# EAGLE board glowbs_5 (EAGLE 7.1.0)
DESIGNER: Quin from Qtechknow; VERSION: v10
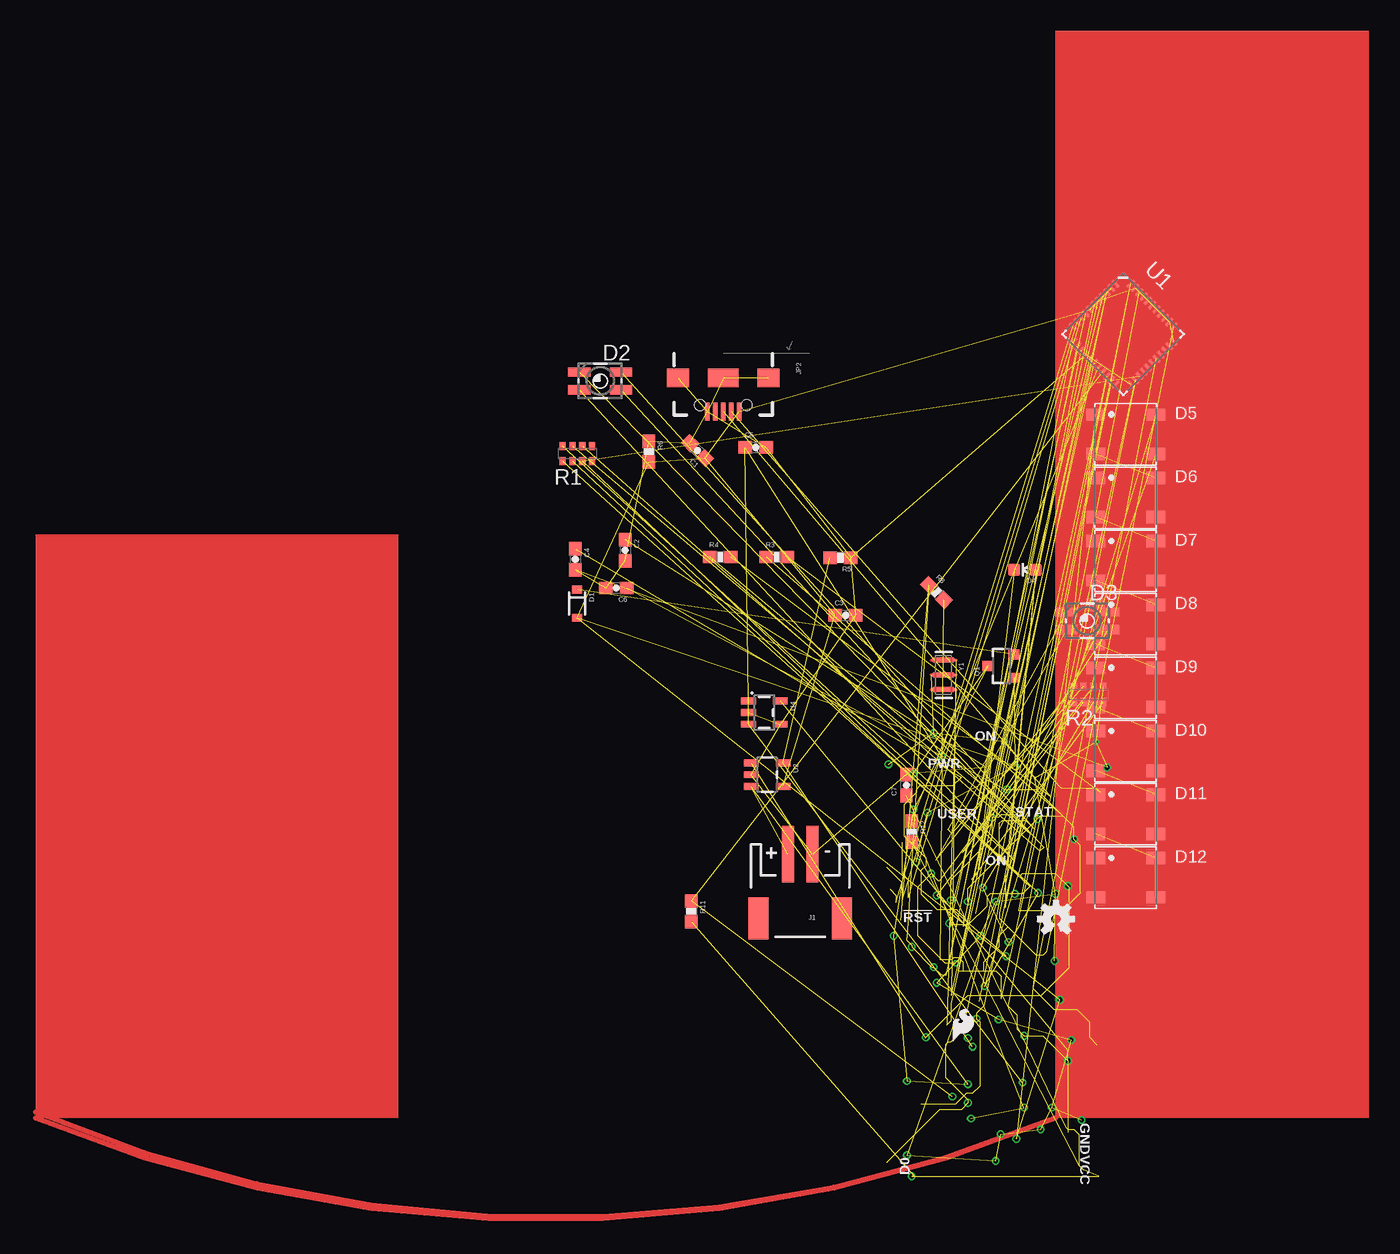
[diagram p0: board, top side]
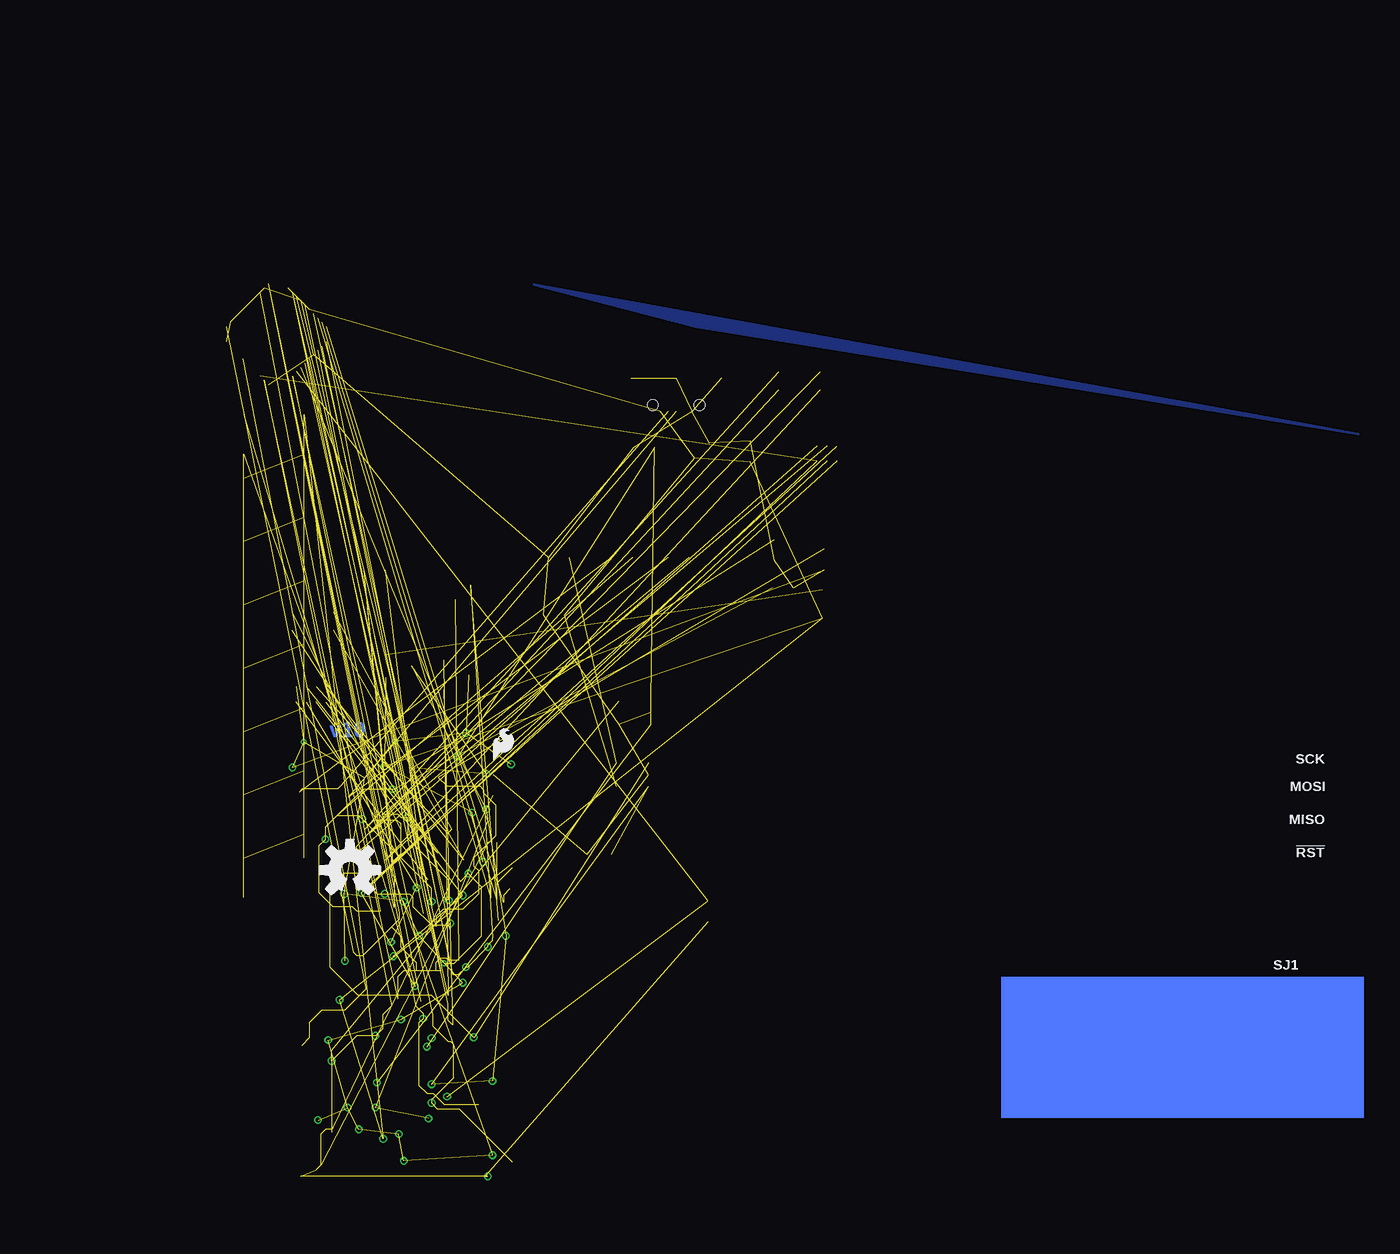
[diagram p1: board, bottom side, seen from below]

No outline drawn. Coordinates in mm, seen from the top.
Copper layers (1*16): Top 0.035mm / dielectric 1.5mm / Bottom 0.035mm
Design rules "Gold_Phoenix_Standard_Spec_2_layer": minimum track width 5mil, minimum drill 6mil, track to track 5mil, track to pad 5mil, pad to pad 5mil, via to via 5mil, smd to smd 5mil, copper to edge 8mil, drill to drill 8mil, minimum pad ring 5mil, minimum via ring 5mil, stop-mask expansion 4mil, vias tented up to drill 20mil, thermal gap 10mil
Net classes: 2 gnd: width 0.254 mm, drill 0.61 mm, clearance 0.254 mm

## Footprints (pad centres in the part's own frame; a part is rotated, then mirrored left to right if it is on the bottom)
0603-CAP = smd 1.1 x 1: 1 -0.85,0; 2 0.85,0
SOD-323 = smd 0.63 x 0.83: A 1.15,0; C -1.15,0
P-LCC-4-3 = smd 0.75 x 1.8: 1 0.725,1.7; 2 -0.725,1.7; 3 -0.725,-1.7; 4 0.725,-1.7
LED-0603 = smd 1 x 1: A 0,-0.877; C 0,0.877
WS2812B = smd 1.5 x 1: 1 -2.45,1.6; 2 -2.45,-1.6; 3 2.45,-1.6; 4 2.45,1.6
JST-2-SMD = smd 1 x 4.6: 1 -1,-3.7; 2 1,-3.7 | smd 1.6 x 3.4: NC1 -3.4,1.5; NC2 3.4,1.5
USB-B-MICRO-SMD_V03 = smd 1.45 x 0.4: D+1 2.725,0; D-1 2.725,0.65; GND1 2.725,-1.3; ID1 2.725,-0.65; VBUS1 2.725,1.3 | smd 1.5 x 1.8: SHIELD1 0,3.685; SHIELD2 0,-3.685 | smd 1.5 x 2.5: SHIELD3 0,0 | hole 0.85: 2.2,1.9; 2.2,-1.9
SOT23-3 = smd 0.8 x 0.9: 1 -0.95,-1; 2 0.95,-1; 3 0,1.1
0603-ARV = smd 0.5 x 0.65: 1 -1.2,-0.625; 2 -0.4,-0.625; 3 0.4,-0.625; 4 1.2,-0.625; 5 1.2,0.625; 6 0.4,0.625; 7 -0.4,0.625; 8 -1.2,0.625
0603-RES = smd 1.1 x 1: 1 -0.85,0; 2 0.85,0
QFN-44-NOPAD_1:1-LESS_PASTE = smd 0.8 x 0.3: 1 -3.337,2.458; 2 -3.337,1.958; 3 -3.337,1.479; 4 -3.337,0.979; 5 -3.337,0.5; 6 -3.337,0; 7 -3.337,-0.5; 8 -3.337,-0.979; 9 -3.337,-1.479; 10 -3.337,-1.958; 11 -3.337,-2.458; 23 3.337,-2.458; 24 3.337,-1.958; 25 3.337,-1.479; 26 3.337,-0.979; 27 3.337,-0.5; 28 3.337,0; 29 3.337,0.5; 30 3.337,0.979; 31 3.337,1.479; 32 3.337,1.958; 33 3.337,2.458 | smd 0.3 x 0.8: 12 -2.458,-3.337; 13 -1.958,-3.337; 14 -1.479,-3.337; 15 -0.979,-3.337; 16 -0.5,-3.337; 17 0,-3.337; 18 0.5,-3.337; 19 0.979,-3.337; 20 1.479,-3.337; 21 1.958,-3.337; 22 2.458,-3.337; 34 2.458,3.337; 35 1.958,3.337; 36 1.479,3.337; 37 0.979,3.337; 38 0.5,3.337; 39 0,3.337; 40 -0.5,3.337; 41 -0.979,3.337; 42 -1.479,3.337; 43 -1.958,3.337; 44 -2.458,3.337
SOT23-5 = smd 0.55 x 1.2: 1 -0.95,-1.3; 2 0,-1.3; 3 0.95,-1.3; 4 0.95,1.3; 5 -0.95,1.3
RESONATOR-SMD = smd 0.45 x 1.905: 1 -1.2,0; 2 0,0; 3 1.2,0

## Placement (x,y rotation side)
C1  4.7uF  [0603-CAP]  53.87,54.32 135 top
C2  4.7uF  [0603-CAP]  47.97,46.22 270 top
C3  1uF  [0603-CAP]  65.91,40.92 0 top
C4  1uF  [0603-CAP]  43.92,45.47 270 top
C5  1uF  [0603-CAP]  58.59,54.59 0 top
C6  0.1uF  [0603-CAP]  47.26,43.13 180 top
C7  2.2uF  [0603-CAP]  70.86,27.11 90 top
D1  BAT20J  [SOD-323]  44.06,41.86 270 top
D2  [P-LCC-4-3]  45.94,59.99 90 top
D3  [P-LCC-4-3]  85.58,40.46 90 top
D4  POWER  [LED-0603]  80.52,44.61 90 top
D5  [WS2812B]  88.7,55.66 0 top
D6  [WS2812B]  88.7,50.5 0 top
D7  [WS2812B]  88.7,45.34 0 top
D8  [WS2812B]  88.7,40.19 0 top
D9  [WS2812B]  88.7,35.03 0 top
D10  [WS2812B]  88.7,29.87 0 top
D11  [WS2812B]  88.7,24.72 0 top
D12  [WS2812B]  88.7,19.56 0 top
J1  LiPo  [JST-2-SMD]  62.22,17.76 180 top
JP2  [USB-B-MICRO-SMD_V03]  55.96,60.23 270 top
LOGO1  OSHW-LOGOS  [OSHW-LOGO-S]  83.04,16.19 0 top
LOGO2  SFE_LOGO_FLAME.1_INCH  [SFE_LOGO_FLAME_.1]  71.17,28.79 0 bottom
LOGO3  SFE_LOGO_FLAME.1_INCH  [SFE_LOGO_FLAME_.1@1]  74.35,5.93 0 top
Q1  ZXMP6A13FTA  [SOT23-3]  78.62,36.79 90 top
R1  1KΩ  [0603-ARV]  44.09,54.08 0 top
R2  1KΩ  [0603-ARV]  85.68,34.48 0 top
R3  22  [0603-RES]  60.32,45.66 0 top
R4  22  [0603-RES]  55.72,45.66 0 top
R5  2.0k  [0603-RES]  65.5,45.61 180 top
R6  100k  [0603-RES]  49.91,54.25 270 top
R8  10K  [0603-RES]  73.31,42.79 315 top
R11  4.7K  [0603-RES]  53.36,16.82 270 top
R12  4.7K  [0603-RES]  71.29,23.32 270 top
U1  ATMEGA32U41:1-LESS_PASTE  [QFN-44-NOPAD_1:1-LESS_PASTE]  88.51,63.81 315 top
U2  MCP73831  [SOT23-5]  59.53,27.94 270 top
U4  AP2112K-3.3TRG-1  [SOT23-5]  59.3,33 270 top
U$4  [OSHW-LOGO-M]  82.52,20.17 0 bottom
Y1  8MHZ  [RESONATOR-SMD]  73.89,36.07 270 top

## Library data of the parts
C1 C2 = SparkFun-Passives; PROD_ID: CAP-08280
C3-C5 = SparkFun-Passives; PROD_ID: CAP-00868
C6 = SparkFun-Capacitors; PROD_ID: CAP-00810
C7 = SparkFun-Capacitors; PROD_ID: CAP-07888
D1 = SparkFun-DiscreteSemi; PROD_ID: DIO-11623
D2 D3 = SparkFun-LED; PROD_ID: DIO-12986
D4 = SparkFun-LED; PROD_ID: DIO-00821
D5-D12 = SparkFun-LED
J1 = SparkFun-Connectors; BTM_NEG: -; BTM_POS: +; PROD_ID: CONN-11443; TOP_NEG: -; TOP_POS: +
JP2 = SparkFun-Connectors; PROD_ID: CONN-11752
LOGO1-LOGO3 U$4 = SparkFun-Aesthetics
Q1 = SparkFun-DiscreteSemi; PROD_ID: TRANS-08285
R1 R2 = SparkFun-Passives; PROD_ID: RES-12985
R3 R4 = SparkFun-Resistors; PROD_ID: RES-08698
R5 = SparkFun-Resistors; PROD_ID: RES-08296
R6 = SparkFun-Resistors; PROD_ID: RES-07828
R8 = SparkFun-Resistors; PROD_ID: RES-00824
R11 R12 = SparkFun-Passives; PROD_ID: RES-07857
U1 = SparkFun-DigitalIC; PROD_ID: IC-10828
U2 = SparkFun; PROD_ID: IC-09995
U4 = SparkFun-PowerIC; PROD_ID: VREG-12457
Y1 = SparkFun-FreqCtrl; PROD_ID: XTAL-08895

## Nets
!RST: R8.1 U1.13
AREF: C6.1 U1.42
D9: U1.29
D10: R2.2
D11: R2.1 U1.12
D13: R2.3
D+: R4.1 U1.4
D-: R3.1 U1.3
GND: C1.2 C2.2 C3.2 C4.2 C5.2 C6.2 C7.2 D5.3 D6.3 D7.3 D8.3 D9.3 D10.3 D11.3 D12.3 J1.1 JP2.GND1 JP2.SHIELD1 JP2.SHIELD2 JP2.SHIELD3 R2.5 R5.1 R6.1 U1.5 U1.15 U1.23 U1.33 U1.35 U1.43 U2.2 U4.2 U4.4 Y1.2
INMOSFET: D1.C Q1.2
LED_DIGIT: D5.4 R1.3 U1.25
LIPO: C2.1 J1.2 Q1.3 U2.3
MISO: U1.11
MOSI: U1.10
N$1: D2.3 R1.6
N$2: D2.2 R1.8
N$3: D3.3 R2.6
N$4: D4.C R2.4
N$5: U1.28
N$6: D5.2 D6.4
N$8: D3.2 R2.8
N$9: D6.2 D7.4
N$10: D7.2 D8.4
N$11: D8.2 D9.4
N$12: D9.2 D10.4
N$13: D10.2 D11.4
N$14: D11.2 D12.4
N$34: D2.1 R1.7
N$37: D3.1 R2.7
PROG: R5.2 U2.5
RX: U1.20
RXLED: R1.2 U1.8
SCK: U1.9
SCL: R12.1 U1.18
SDA: R11.1 U1.19
STAT: R1.1 U2.1
TX: U1.21
UCAP: C4.1 U1.6
UD+: JP2.D+1 R4.2
UD-: JP2.D-1 R3.2
VBUS: C1.1 C3.1 D1.A D5.1 D6.1 D7.1 D8.1 D9.1 D10.1 D11.1 D12.1 JP2.VBUS1 Q1.1 R6.2 U1.2 U1.7 U2.4
VCC: C7.1 D2.4 D3.4 D4.A R8.2 R11.2 R12.2 U1.14 U1.24 U1.34 U1.44 U4.5
VINPUT: C5.1 U4.1 U4.3
X1: U1.17 Y1.3
X2: U1.16 Y1.1

## Tracks (layer width: path | path; a pad name or v marks a point on that pad's centre or on a via)
!RST  (via drill 0.38)  (10 unrouted)
  other vias: 73.08,12.28 71.3,13.93
AREF  (via drill 0.38)  (12 unrouted)
  other vias: 79.05,26.76 84.51,22.69
D9  (7 unrouted)
D10  (via drill 0.38)  (2 unrouted)
  other vias: 73.33,18.12 78.99,13.17
D11  (via drill 0.25, 0.38)  (8 unrouted)
  other vias: 72.89,19.9 74.87,12.58
D13  (via drill 0.38)  (2 unrouted)
  other vias: 77.08,18.76 79.18,14.31
D+  (via drill 0.38)  (9 unrouted)
  other vias: 77.84,24.47 74.48,17.74
D-  (via drill 0.38)  (8 unrouted)
  other vias: 81.53,24.34 75.87,17.61
GND  (via drill 0.25, 0.38)  (51 unrouted)
  Top 0.203: 81.31,27.67 81.33,27.65
  other vias: 82.99,18.25 82.92,12.79 73.33,11.01 78.16,17.61 76.89,14.82 70.92,-3.02 78.54,-1.31 78.13,-3.49 73.08,31.33 87.2,28.54 78.36,8.01 69.4,28.79 82.71,0.85 85.12,-0.17 81.79,-0.93 84.28,6.34 78.87,30.64 86.29,30.62
  pour Bottom (isolate 0.305): 0.46,55.65 67.54,67.84 54.22,64.37
INMOSFET  (1 unrouted)
LED_DIGIT  (via drill 0.38)  (4 unrouted)
  other vias: 81.59,18.31 77.23,10.73
LIPO  (via drill 0.38)  (9 unrouted)
  other vias: 71.43,25.11 69.83,14.82 71.43,28.03 70.92,3.01 75.87,2.75
MISO  (3 unrouted)
MOSI  (3 unrouted)
N$1  (3 unrouted)
N$2  (2 unrouted)
N$3  (3 unrouted)
N$4  (3 unrouted)
N$6  (1 unrouted)
N$7  (via drill 0.38)
  other vias: 75.87,6.5
N$8  (2 unrouted)
N$9  (1 unrouted)
N$10  (1 unrouted)
N$11  (1 unrouted)
N$12  (1 unrouted)
N$13  (1 unrouted)
N$14  (1 unrouted)
N$15
  Top 0.406: 0,0.5 arc45 83,0 arc-45 0,0
N$34  (3 unrouted)
N$37  (3 unrouted)
PROG  (via drill 0.38)  (2 unrouted)
  other vias: 76.25,5.8
RX  (via drill 0.38)  (12 unrouted)
  other vias: 75.87,1.23
RXLED  (via drill 0.38)  (11 unrouted)
  other vias: 79.68,18.25 74.35,15.84
SCK  (4 unrouted)
SCL  (via drill 0.38)  (3 unrouted)
  other vias: 80.45,0.85 76.13,-0.04
SDA  (via drill 0.38)  (2 unrouted)
  other vias: 74.6,1.74
STAT  (via drill 0.38)  (11 unrouted)
  other vias: 84,18.88 72.44,6.57
TX  (via drill 0.38)  (9 unrouted)
  other vias: 76.57,8.09
UCAP  (16 unrouted)
UD+  (2 unrouted)
UD-  (5 unrouted)
VBUS  (via drill 0.38)  (21 unrouted)
  other vias: 71.68,20.85 72.57,24.85 83.37,9.61 79.81,-1.69 79.68,28.66
VCC  (via drill 0.38)  (59 unrouted)
  other vias: 80.45,6.69 84,4.66 71.3,-4.74
VINPUT  (via drill 0.38)  (4 unrouted)
  other vias: 73.72,29.43 80.32,2.88
X1  (4 unrouted)
X2  (2 unrouted)
(copper drawn outside any net)
  shapes: Bottom area x1, Top area x4

## Text on the board
tPlace: ON | PWR | USER | STAT | ON | !RST | GND | D0 | VCC
bPlace: SCK | MOSI | MISO | !RST | SJ1